# EAGLE board uhu-adapter (EAGLE 7.7.0)
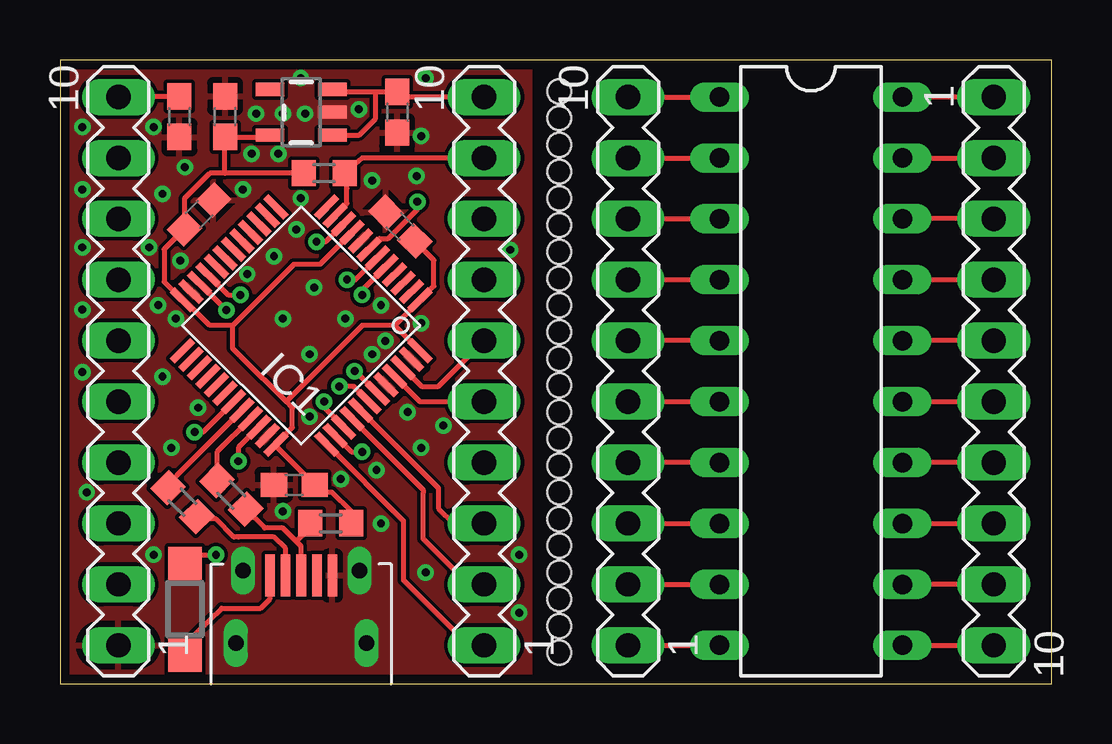
[diagram p0: board, top side]
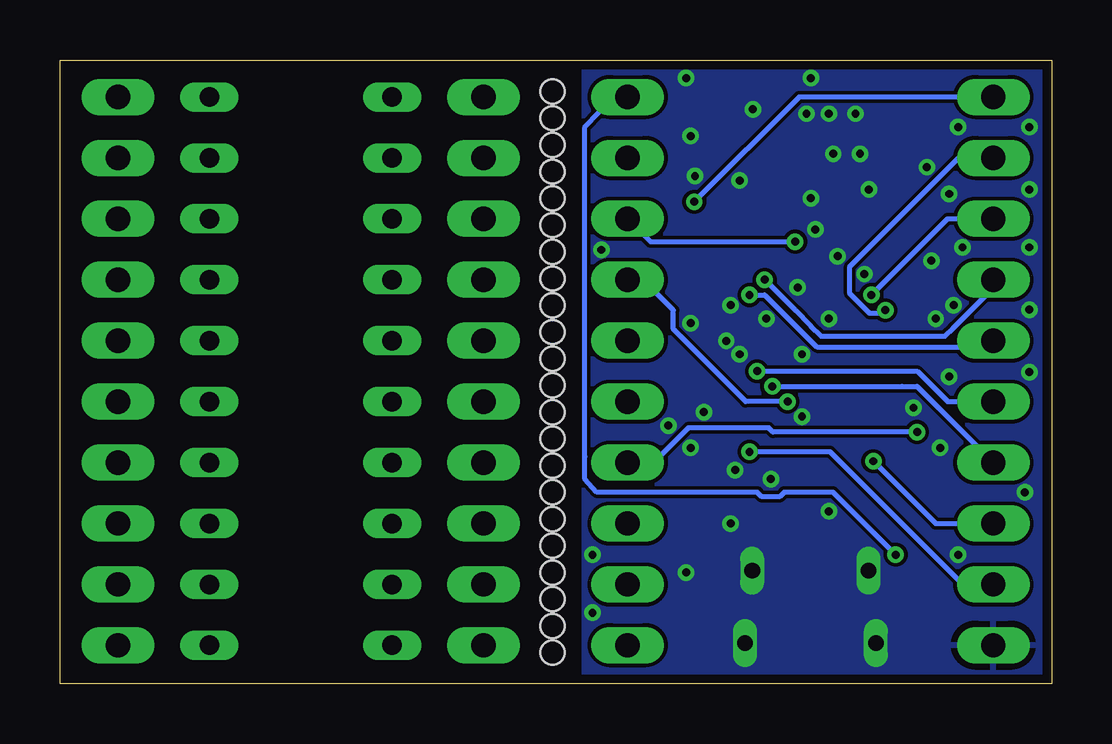
[diagram p1: board, bottom side, seen from below]

Size 41.32 x 26.02 mm. Coordinates in mm from the lower left corner, seen from the top.
Outline: 0,0 41.32,0 41.32,26.02 0,26.02 0,0
Copper layers (1*16): Top 0.0356mm / dielectric 1.5011mm / Bottom 0.0356mm
Design rules "osh *": minimum track width 6mil, minimum drill 13mil, track to track 6mil, track to pad 6mil, pad to pad 6mil, via to via 6mil, smd to smd 6mil, copper to edge 15mil, drill to drill 6mil, minimum pad ring 7mil, minimum via ring 7mil, stop-mask expansion 3mil, vias tented up to drill 15mil, thermal gap 10mil
Holes 1 mm at 20.8,1.3 20.8,2.41 20.8,3.53 20.8,4.64 20.8,5.76 20.8,6.87 20.8,7.99 20.8,9.1 20.8,10.22 20.8,11.33 20.8,12.45 20.8,13.56 20.8,14.67 20.8,15.79 20.8,16.9 20.8,18.02 20.8,19.13 20.8,20.25 20.8,21.36 20.8,22.48 20.8,23.59 20.8,24.7

## Footprints (pad centres in the part's own frame; a part is rotated, then mirrored left to right if it is on the bottom)
C0603 = smd 1.1 x 1: 1 -0.85,0; 2 0.85,0
SOD123 = smd 1.4 x 1.4: A 1.9,0; C -1.9,0
LQFP48 = smd 0.3 x 1.2: 1 -2.75,-4.25; 2 -2.25,-4.25; 3 -1.75,-4.25; 4 -1.25,-4.25; 5 -0.75,-4.25; 6 -0.25,-4.25; 7 0.25,-4.25; 8 0.75,-4.25; 9 1.25,-4.25; 10 1.75,-4.25; 11 2.25,-4.25; 12 2.75,-4.25; 25 2.75,4.25; 26 2.25,4.25; 27 1.75,4.25; 28 1.25,4.25; 29 0.75,4.25; 30 0.25,4.25; 31 -0.25,4.25; 32 -0.75,4.25; 33 -1.25,4.25; 34 -1.75,4.25; 35 -2.25,4.25; 36 -2.75,4.25 | smd 1.2 x 0.3: 13 4.25,-2.75; 14 4.25,-2.25; 15 4.25,-1.75; 16 4.25,-1.25; 17 4.25,-0.75; 18 4.25,-0.25; 19 4.25,0.25; 20 4.25,0.75; 21 4.25,1.25; 22 4.25,1.75; 23 4.25,2.25; 24 4.25,2.75; 37 -4.25,2.75; 38 -4.25,2.25; 39 -4.25,1.75; 40 -4.25,1.25; 41 -4.25,0.75; 42 -4.25,0.25; 43 -4.25,-0.25; 44 -4.25,-0.75; 45 -4.25,-1.25; 46 -4.25,-1.75; 47 -4.25,-2.25; 48 -4.25,-2.75
DIL20 = drill 0.813 long: 1 -11.43,-3.81; 2 -8.89,-3.81; 3 -6.35,-3.81; 4 -3.81,-3.81; 5 -1.27,-3.81; 6 1.27,-3.81; 7 3.81,-3.81; 8 6.35,-3.81; 9 8.89,-3.81; 10 11.43,-3.81; 11 11.43,3.81; 12 8.89,3.81; 13 6.35,3.81; 14 3.81,3.81; 15 1.27,3.81; 16 -1.27,3.81; 17 -3.81,3.81; 18 -6.35,3.81; 19 -8.89,3.81; 20 -11.43,3.81
SOT23-5 = smd 0.55 x 1.2: 1 -0.95,-1.3; 2 0,-1.3; 3 0.95,-1.3; 4 0.95,1.3; 5 -0.95,1.3
FCI-10103594-0001LF = smd 0.4 x 1.75: 1 -1.3,4.525; 2 -0.65,4.525; 3 0,4.525; 4 0.65,4.525; 5 1.3,4.525 | drill 0.65 pad 1 long: 6 2.425,4.73; 7 2.725,1.7; 8 -2.725,1.7; 9 -2.425,4.73
R0603 = smd 1 x 1.1: 1 -0.85,0; 2 0.85,0
MA10-1 = drill 1.016 long: 1 -11.43,0; 2 -8.89,0; 3 -6.35,0; 4 -3.81,0; 5 -1.27,0; 6 1.27,0; 7 3.81,0; 8 6.35,0; 9 8.89,0; 10 11.43,0

## Placement (x,y rotation side)
C1  100n  [C0603]  4.97,23.65 270 top
C2  100n  [C0603]  5.79,19.58 45 top
C3  100n  [C0603]  14.05,23.84 270 top
C4  100n  [C0603]  14.18,19.07 135 top
C5  100n  [C0603]  9.76,8.3 180 top
C6  100n  [C0603]  6.88,23.65 90 top
D1  [SOD123]  5.2,3.11 270 top
IC1  STM32F303CBT  [LQFP48]  10.05,14.95 135 top
IC3  [DIL20]  31.29,13.04 270 top
IC4  [SOT23-5]  10.05,23.84 90 top
JP1  USB-RECEPTABLE  [FCI-10103594-0001LF]  10.05,0 0 top
R1  22  [R0603]  7.14,7.88 315 top
R2  22  [R0603]  5.1,7.58 315 top
R3  1k5  [R0603]  11.28,6.7 180 top
R4  10k  [R0603]  11,21.3 0 top
SV1  [MA10-1]  23.67,13.04 90 top
SV2  [MA10-1]  38.91,13.04 270 top
SV3  [MA10-1]  17.67,13.04 90 top
SV4  [MA10-1]  2.43,13.04 90 top

## Library data of the parts
C1-C6 R1-R4 = rcl
D1 = diode
IC1 = micro-stm_v2
IC3 = ic-package
IC4 = SparkFun-PowerIC
JP1 = reroolib
SV1-SV4 = con-lstb; OC_FARNELL: unknown; OC_NEWARK: unknown

## Nets
3V3: C2.1 C4.1 C5.1 C6.1 IC1.1 IC1.9 IC1.24 IC1.36 IC1.48 IC4.5 R3.1 R4.1
5V: C3.1 D1.C IC4.1 IC4.3 SV3.10
5VUSB: D1.A JP1.1
A: IC1.40 SV3.2
B: IC1.41 SV3.3
CLK: IC1.43 SV4.5
DIR: IC1.42 SV4.4
DM: IC1.32 R2.1
DP: IC1.33 R1.1
EN: IC1.46 SV3.6
ERROR: IC1.39 SV3.7
GND: C1.2 C2.2 C3.2 C4.2 C5.2 C6.2 IC1.8 IC1.23 IC1.35 IC1.44 IC1.47 IC4.2 JP1.5 JP1.6 JP1.7 JP1.8 JP1.9 SV4.1
IO1: IC1.38 SV4.2
IO3: IC1.10 SV3.8
IO4: IC1.11 R4.2 SV3.9
N$1: IC3.10 SV1.1
N$2: IC3.9 SV1.2
N$3: IC3.8 SV1.3
N$4: IC3.7 SV1.4
N$5: IC3.6 SV1.5
N$6: IC3.5 SV1.6
N$7: IC3.4 SV1.7
N$8: IC3.3 SV1.8
N$9: IC3.2 SV1.9
N$10: IC3.1 SV1.10
N$11: IC3.20 SV2.1
N$12: IC3.19 SV2.2
N$13: IC3.18 SV2.3
N$14: IC3.17 SV2.4
N$15: IC3.16 SV2.5
N$16: IC3.15 SV2.6
N$17: IC3.14 SV2.7
N$18: IC3.13 SV2.8
N$19: IC3.12 SV2.9
N$20: IC3.11 SV2.10
N$21: IC1.2
N$22: IC1.3
N$23: JP1.3 R1.2 R3.2
N$24: JP1.2 R2.2
N$25: IC1.4
NRST: C1.1 IC1.7 SV4.10
PWM: IC1.45 SV3.5
RX: IC1.22 SV4.9
START: IC1.31 SV3.4
SWCLK: IC1.37 SV3.1
SWDIO: IC1.34 SV4.3
TX: IC1.21 SV4.8
XTAL1: IC1.5 SV4.6
XTAL2: IC1.6 SV4.7

## Tracks (layer width: path | path; a pad name or v marks a point on that pad's centre or on a via)
3V3
  Top 0.2: C6.1 8.84,22.8 IC4.5 8.56,22.89 | 13.94,14.95 IC1.1 15.58,16.59 15.58,17.67 C4.1 | 6.56,22.99 C6.1 | R4.1 6.87,21.3 | 6.87,21.3 6.24,21.3 5.19,20.25 C2.1 4.34,18.12 4.34,16.77 IC1.24 5.18,16.01 6.24,14.95 7.19,14.95 | 9.42,11.77 7.51,13.68 7.19,13.99 7.19,14.95 | 9.42,11.77 9.69,11.5 9.69,10.69 IC1.36 8.99,9.92 C5.1 10.93,7.99 11.33,7.99 12.13,7.19 R3.1 | IC1.9 10.82,17.49 9.73,17.49 7.19,14.95 | 9.42,11.77 12.59,14.95 13.94,14.95 | IC1.48 13.94,14.95 | 13.94,14.95 | 6.87,21.3 C6.1
5V  (via drill 0.33)
  Top 0.2: IC4.3 11.45,24.69 13.15,24.69 | 13.15,24.69 C3.1 14.08,24.47 SV3.10 | IC4.1 12.46,22.89 13.15,23.57 13.15,24.69 | D1.C 5.43,5.39 v6.5,5.39
  Bottom 0.2: v6.5,5.39 9.1,7.99 11.14,7.99 11.33,7.8 12.07,7.8 12.26,7.99 18.95,7.99 19.45,8.54 19.45,9.47 19.45,23.22 18.25,24.47 SV3.10
5VUSB
  Top 0.2: D1.A 5.2,1.67 6.73,3.16 8.36,3.16 8.75,3.55 JP1.1
A
  Top 0.2: IC1.40 15.13,8.1 15.13,7.96 15.13,6.06 15.77,5.42 17.04,4.15 SV3.2
B
  Top 0.2: IC1.41 15.77,8.17 15.77,7.33 16.4,6.69 SV3.3
CLK  (via drill 0.33)
  Top 0.2: IC1.43 12.31,13.04 v12.27,13.04
  Bottom 0.2: v12.27,13.04 11.64,13.04 5.61,13.04 4.34,11.77 SV4.5
DIR  (via drill 0.33)
  Top 0.2: IC1.42 12.24,12.41 v11.64,12.41
  Bottom 0.2: v11.64,12.41 6.24,12.41 5.61,12.41 SV4.4
DM
  Top 0.2: IC1.32 4.87,8.7 R2.1
DP
  Top 0.2: IC1.33 6.54,9.67 R1.1
EN
  Top 0.2: IC1.46 15.07,12.41 15.77,12.41 SV3.6
ERROR  (via drill 0.33)
  Top 0.2: IC1.39 11.01,11.52 v11.01,11.77
  Bottom 0.2: v11.01,11.77 12.75,11.77 15.77,14.79 15.77,15.58 17.04,16.85 SV3.7
GND  (via drill 0.33)
  other vias: 15.23,4.64 15.05,9.84 14.49,11.33 13.37,6.69 11.7,8.54 4.64,9.84 5.76,11.52 4.27,12.82 10.4,11.14 13.56,14.3 13,13.75 13.37,15.79 11.89,15.23 10.59,16.53 9.29,15.23 10.4,13.75 8.92,17.83 9.84,18.95 5.02,17.65 3.71,18.2 0.93,18.2 0.93,15.6 0.93,13 4.83,15.23 4.09,15.79 10.03,20.25 7.62,20.62 7.99,22.1 9.1,22.1 10.22,23.78 8.17,23.78 9.29,23.78 5.2,21.55 4.27,20.43 0.93,20.62 3.9,23.22 13,20.99 14.86,21.18 0.93,23.22 15.05,22.85 15.23,25.26 10.03,25.26 15.05,15.05 9.29,7.2 3.9,5.39 19.13,5.39 19.13,2.97 15.97,10.77 18.76,18.1 12.45,23.96 1.11,7.99 7.8,17.09 13.19,8.92
  pour Top: -0.03,25.93 19.58,25.93 19.58,-0.03 -0.03,-0.03
  pour Top (no thermals): 9.73,24.47 12.41,24.47 12.41,23.2 9.73,23.2
  pour Bottom: 0,26 19.5,26 19.5,0 0,0
IO1  (via drill 0.33)
  Top 0.2: 12.65,9.68 v12.59,9.68 12.14,9.68 IC1.38
  Bottom 0.2: v12.59,9.68 9.23,9.68 3.7,4.15 SV4.2
IO3  (via drill 0.33)
  Top 0.2: IC1.10 11.07,18.44 v10.69,18.44
  Bottom 0.2: SV3.8 16.72,18.44 v10.69,18.44
IO4
  Top 0.2: SV3.9 12.59,21.93 R4.2 11.96,21.3 11.96,20.66 11.96,20.03 IC1.11
N$1
  Top 0.2: SV1.1 IC3.10
N$2
  Top 0.2: SV1.2 IC3.9
N$3
  Top 0.2: SV1.3 IC3.8
N$4
  Top 0.2: IC3.7 SV1.4
N$5
  Top 0.2: SV1.5 IC3.6
N$6
  Top 0.2: IC3.5 SV1.6
N$7
  Top 0.2: SV1.7 IC3.4
N$8
  Top 0.2: SV1.8 IC3.3
N$9
  Top 0.2: SV1.9 IC3.2
N$10
  Top 0.2: SV1.10 IC3.1
N$11
  Top 0.2: SV2.1 IC3.20
N$12
  Top 0.2: IC3.19 SV2.2
N$13
  Top 0.2: SV2.3 IC3.18
N$14
  Top 0.2: IC3.17 SV2.4
N$15
  Top 0.2: SV2.5 IC3.16
N$16
  Top 0.2: IC3.15 SV2.6
N$17
  Top 0.2: SV2.7 IC3.14
N$18
  Top 0.2: IC3.13 SV2.8
N$19
  Top 0.2: SV2.9 IC3.12
N$20
  Top 0.2: IC3.11 SV2.10
N$23
  Top 0.2: JP1.3 10.05,5.74 9.85,5.94 | 9.85,5.94 9.29,6.5 8.52,6.5 R1.2 | R3.2 10.41,6.51 9.85,5.94
N$24
  Top 0.2: JP1.2 9.4,5.64 8.92,6.13 7.43,6.13 7.24,6.13 6.5,6.87 5.81,6.87 R2.2
NRST  (via drill 0.33)
  Top 0.2: 14.89,19.79 v14.89,20.1 14.89,19.79 | SV4.10 2.46,24.5 C1.1 | IC1.7 13.32,18.57 13.68,18.57 14.89,19.79
  Bottom 0.2: SV4.10 10.53,24.47 v14.89,20.1
PWM
  Top 0.2: IC1.45 14.99,11.77 SV3.5
RX  (via drill 0.33)
  Top 0.2: IC1.22 6.56,15.96 v6.93,15.58
  Bottom 0.2: v6.93,15.58 7.06,15.45 7.59,15.45 8.41,16.27 8.41,17.41 3.89,21.93 SV4.9
START  (via drill 0.33)
  Top 0.2: 5.96,10.5 IC1.31 5.96,10.5 | 5.96,10.5 v5.61,10.5
  Bottom 0.2: SV3.4 16.59,9.23 15.13,10.69 11.8,10.69 11.62,10.5 v5.61,10.5
SWCLK
  Top 0.2: SV3.1 17.04,1.61 15.77,2.88 14.31,4.34 14.31,6.8 IC1.37
SWDIO  (via drill 0.33)
  Top 0.2: IC1.34 7.43,9.85 v7.43,9.29
  Bottom 0.2: v7.43,9.29 4.83,6.69 SV4.3
TX  (via drill 0.33)
  Top 0.2: IC1.21 7.01,16.22 v7.51,16.22
  Bottom 0.2: v7.51,16.22 4.34,19.39 SV4.8
XTAL1  (via drill 0.33)
  Top 0.2: IC1.5 12.59,16.43 v12.59,16.22
  Bottom 0.2: v12.59,16.22 11.96,16.22 9.79,14.05 2.7,14.05 SV4.6
XTAL2  (via drill 0.33)
  Top 0.2: v11.96,16.85 12.31,16.85 IC1.6
  Bottom 0.2: v11.96,16.85 10.69,15.58 10.05,14.95 9.6,14.5 5.79,14.5 4.6,14.5 4.45,14.5 4.09,14.86 2.42,16.53 SV4.7

## Text on the board
bStop: STMBL